# EAGLE board ChaiNEO_2x3 (EAGLE 9.6.2)
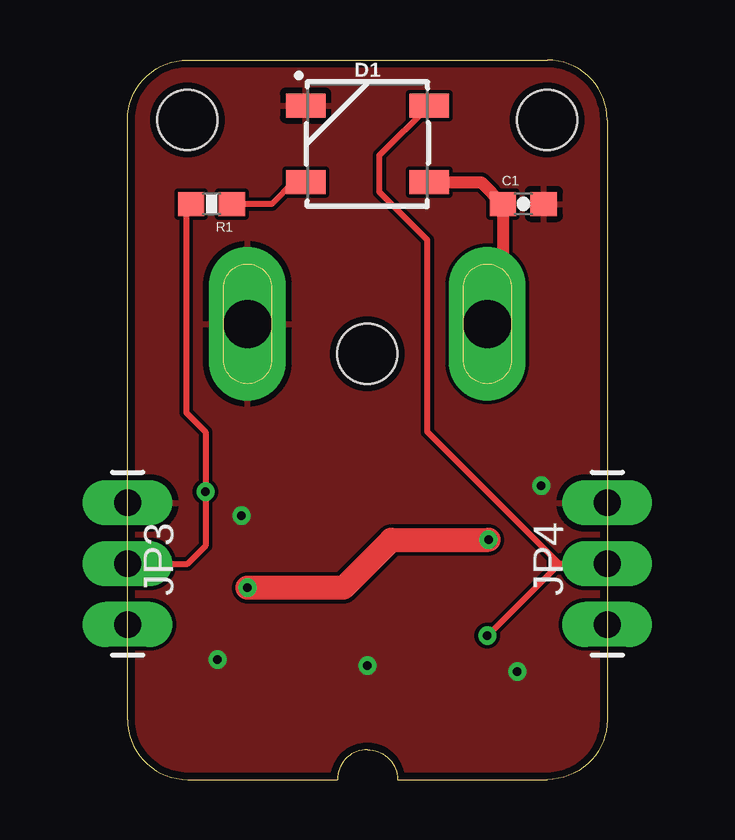
[diagram p0: board, top side]
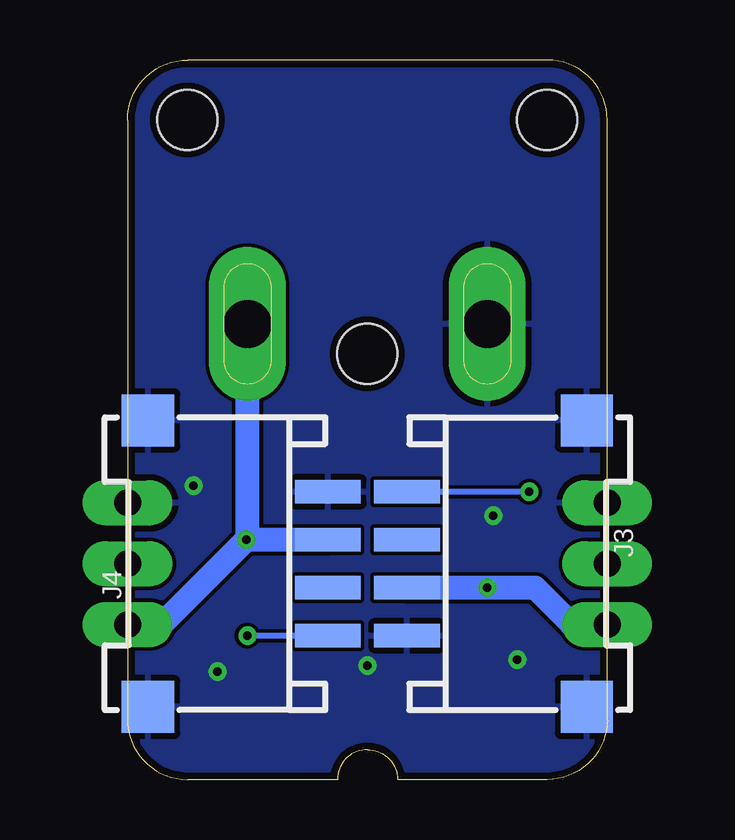
[diagram p1: board, bottom side, seen from below]

Size 20 x 30 mm. Coordinates in mm from the lower left corner, seen from the top.
Outline: 2.5,0 8.75,0 arc-90 10,1.25 arc-90 11.25,0 17.5,0 arc90 20,2.5 20,27.5 arc90 17.5,30 2.5,30 arc90 0,27.5 0,2.5 arc90 2.5,0
Copper layers (1*16): Top 0.035mm / dielectric 1.5mm / Bottom 0.035mm
Design rules "default *": minimum track width 6mil, minimum drill 0.35mm, track to track 6mil, track to pad 6mil, pad to pad 6mil, via to via 6mil, smd to smd 6mil, copper to edge 0.3mm, drill to drill 6mil, minimum pad ring 10mil, minimum via ring 8mil, stop-mask expansion 4mil, vias tented up to drill 20mil, thermal gap 10mil
Holes 2.5 mm at 10,17.75 2.5,27.5 17.5,27.5

## Footprints (pad centres in the part's own frame; a part is rotated, then mirrored left to right if it is on the bottom)
0603-CAP = smd 1.1 x 1: 1 -0.85,0; 2 0.85,0
WS2812B = smd 1.651 x 1: 1 2.577,-1.6; 2 2.577,1.6; 3 -2.577,1.6; 4 -2.577,-1.6
4P-SMD-2.0-90D = smd 0.965 x 2.74: 1 -3,-0.1; 2 -1,-0.1; 3 1,-0.1; 4 3,-0.1 | smd 2.159 x 2.184: SS1 -5.974,7.4; SS2 5.974,7.4
1X03_LONGPADS = drill 1.118 pad 1.88 long: 1 -2.54,0; 2 0,0; 3 2.54,0
0603-RES = smd 1.1 x 1: 1 -0.85,0; 2 0.85,0
PLATED_TIE_MOUNT = drill 2 pad 3.2 long: P$1 0,0

## Placement (x,y rotation side)
C1  [0603-CAP]  16.5,24 0 top
D1  WS2812B  [WS2812B]  10,26.5 0 top
J3  [4P-SMD-2.0-90D]  8.25,9 270 bottom
J4  [4P-SMD-2.0-90D]  11.75,9 90 bottom
JP3  [1X03_LONGPADS]  0,9 90 top
JP4  [1X03_LONGPADS]  20,9 90 top
R1  [0603-RES]  3.5,24 180 top
U$7  PLATED_TIE_MOUNT  [PLATED_TIE_MOUNT]  15,19 0 top
U$8  PLATED_TIE_MOUNT  [PLATED_TIE_MOUNT]  5,19 0 top

## Library data of the parts
C1 JP3 JP4 R1 U$7 U$8 = ChaiNEO
D1 = ChaiNEO; PROD_ID: DIO-12503
J3 J4 = Grove_SMD

## Nets
DI: J3.1 JP3.2 R1.2
DO: D1.2 J4.1 JP4.2
GND: C1.2 D1.3 J3.4 J3.SS1 J3.SS2 J4.4 J4.SS1 J4.SS2 JP3.3 JP4.3 U$8.P$1
N$2: D1.4 R1.1
VCC: C1.1 D1.1 J3.3 J4.3 JP3.1 JP4.1 U$7.P$1

## Tracks (layer width: path | path; a pad name or v marks a point on that pad's centre or on a via)
DI  (via drill 0.35)
  Top 0.254: JP3.2 2.5,9 3.25,9.75 v3.25,12 3.25,14.5 2.45,15.3 2.45,23.8 R1.2
  Bottom 0.254: v3.25,12 J3.1
DO  (via drill 0.35)
  Top 0.254: v15,6 17.75,8.75 | 17.75,8.75 18,9 | JP4.2 18,9 | 18,9 17.75,9.25 | 17.75,9.25 12.5,14.5 12.5,22.5 10.5,24.5 10.5,26.02 D1.2 | 17.75,9.25 17.75,8.75
  Bottom 0.254: J4.1 v15,6
GND  (via drill 0.35)
  other vias: 17.25,12.25 16.25,4.5 3.75,5 4.75,11 10,4.75
  pour Bottom: -0.5,-1 20.5,-1 20.5,31 -0.5,31
  pour Top: -1,-2 21,-2 21,32 -1,32
N$2
  Top 0.254: D1.4 6.92,24.9 6.02,24 R1.1
VCC  (via drill 0.35)
  Top 0.508: D1.1 14.75,24.9 C1.1 15.65,21.5 15,20.85 U$7.P$1
  Top 1: v5,8 9,8 11,10 v15.05,10 | U$7.P$1 15.05,18.95
  Bottom 1: 1.5,6.5 3,8 v5,8 J3.3 | J4.3 v15.05,10 | 18.55,6.5 v15.05,10 | v15.05,10 15,10.05 U$7.P$1
  Bottom 1.016: JP4.1 19.96,6.5 18.55,6.5 | JP3.1 0.04,6.5 1.5,6.5